# Altium PCB AC_FILTER_220V.PcbDoc
Units mm, origin at the board's own origin, x right, y up, seen from the top; angles counter-clockwise.
Board outline 50 x 35 mm, 2 copper layers (Top Layer, Bottom Layer); 9 components, 8 nets, 21 pads, 0 vias.
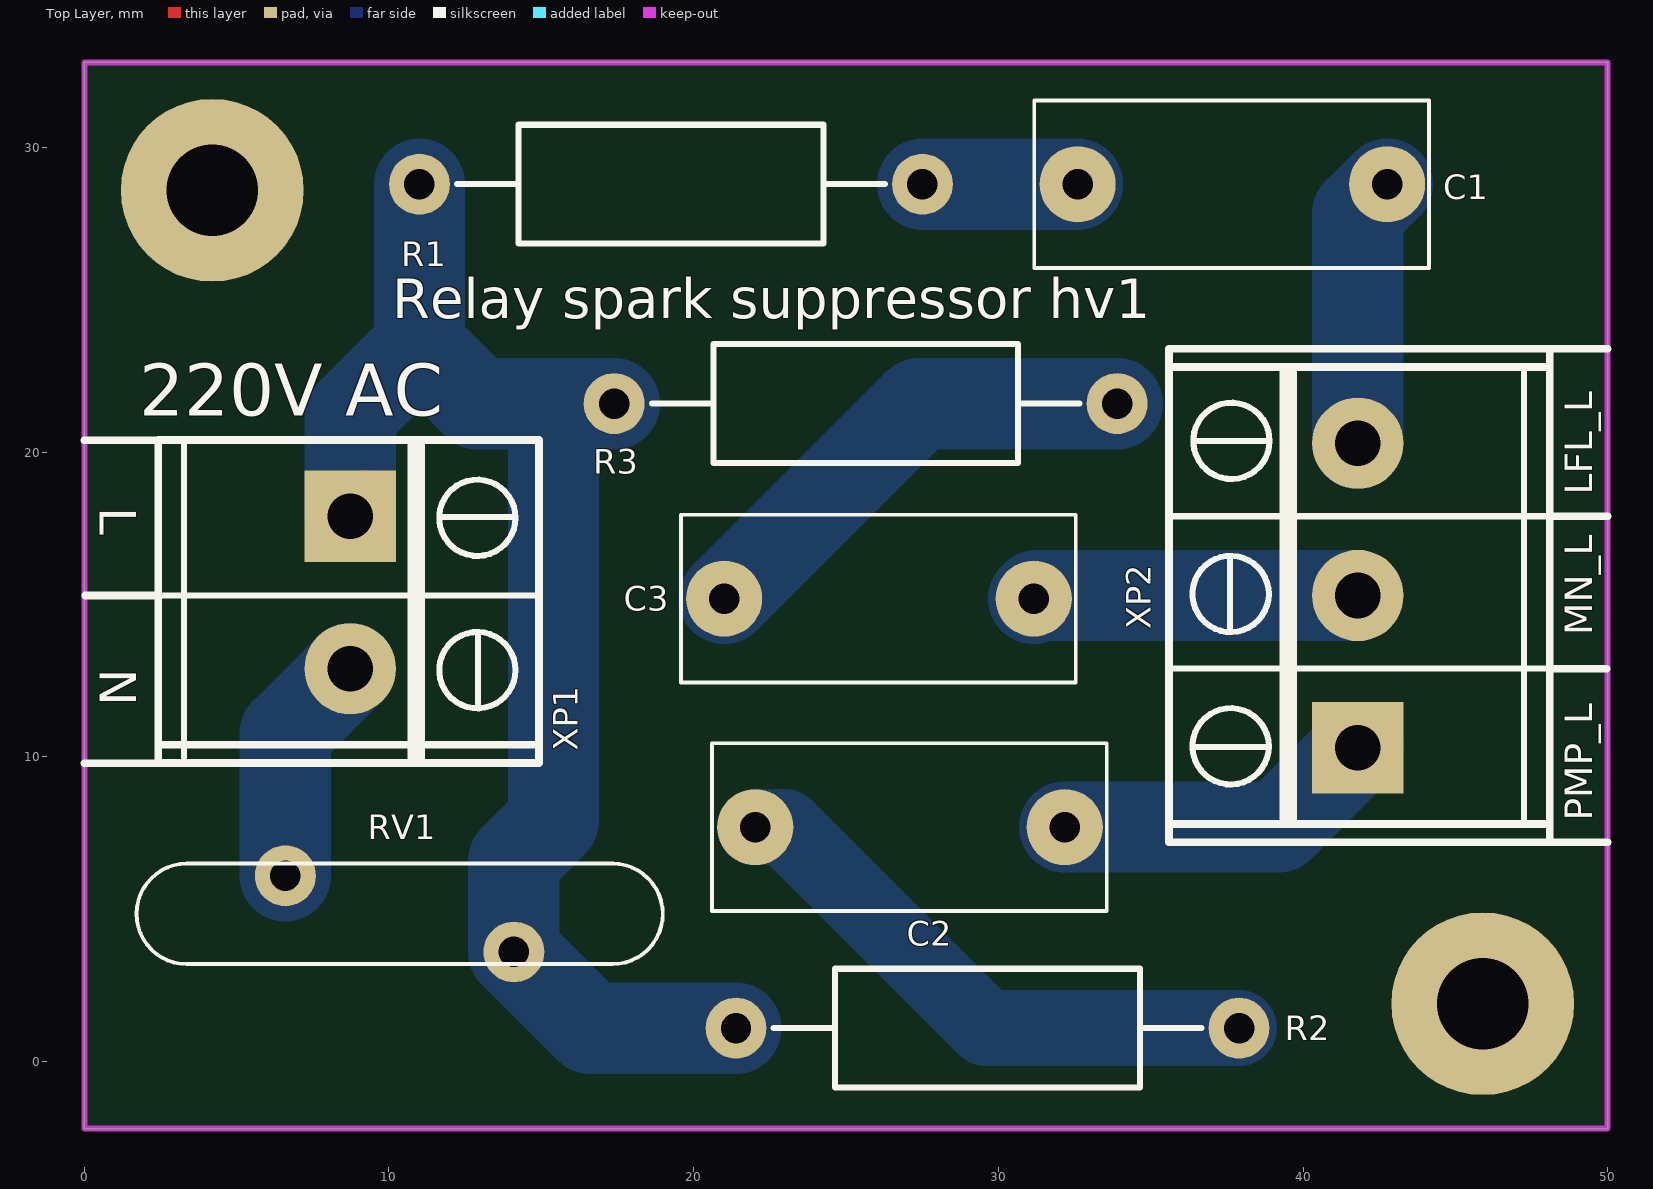
[diagram p0: Top Layer view]
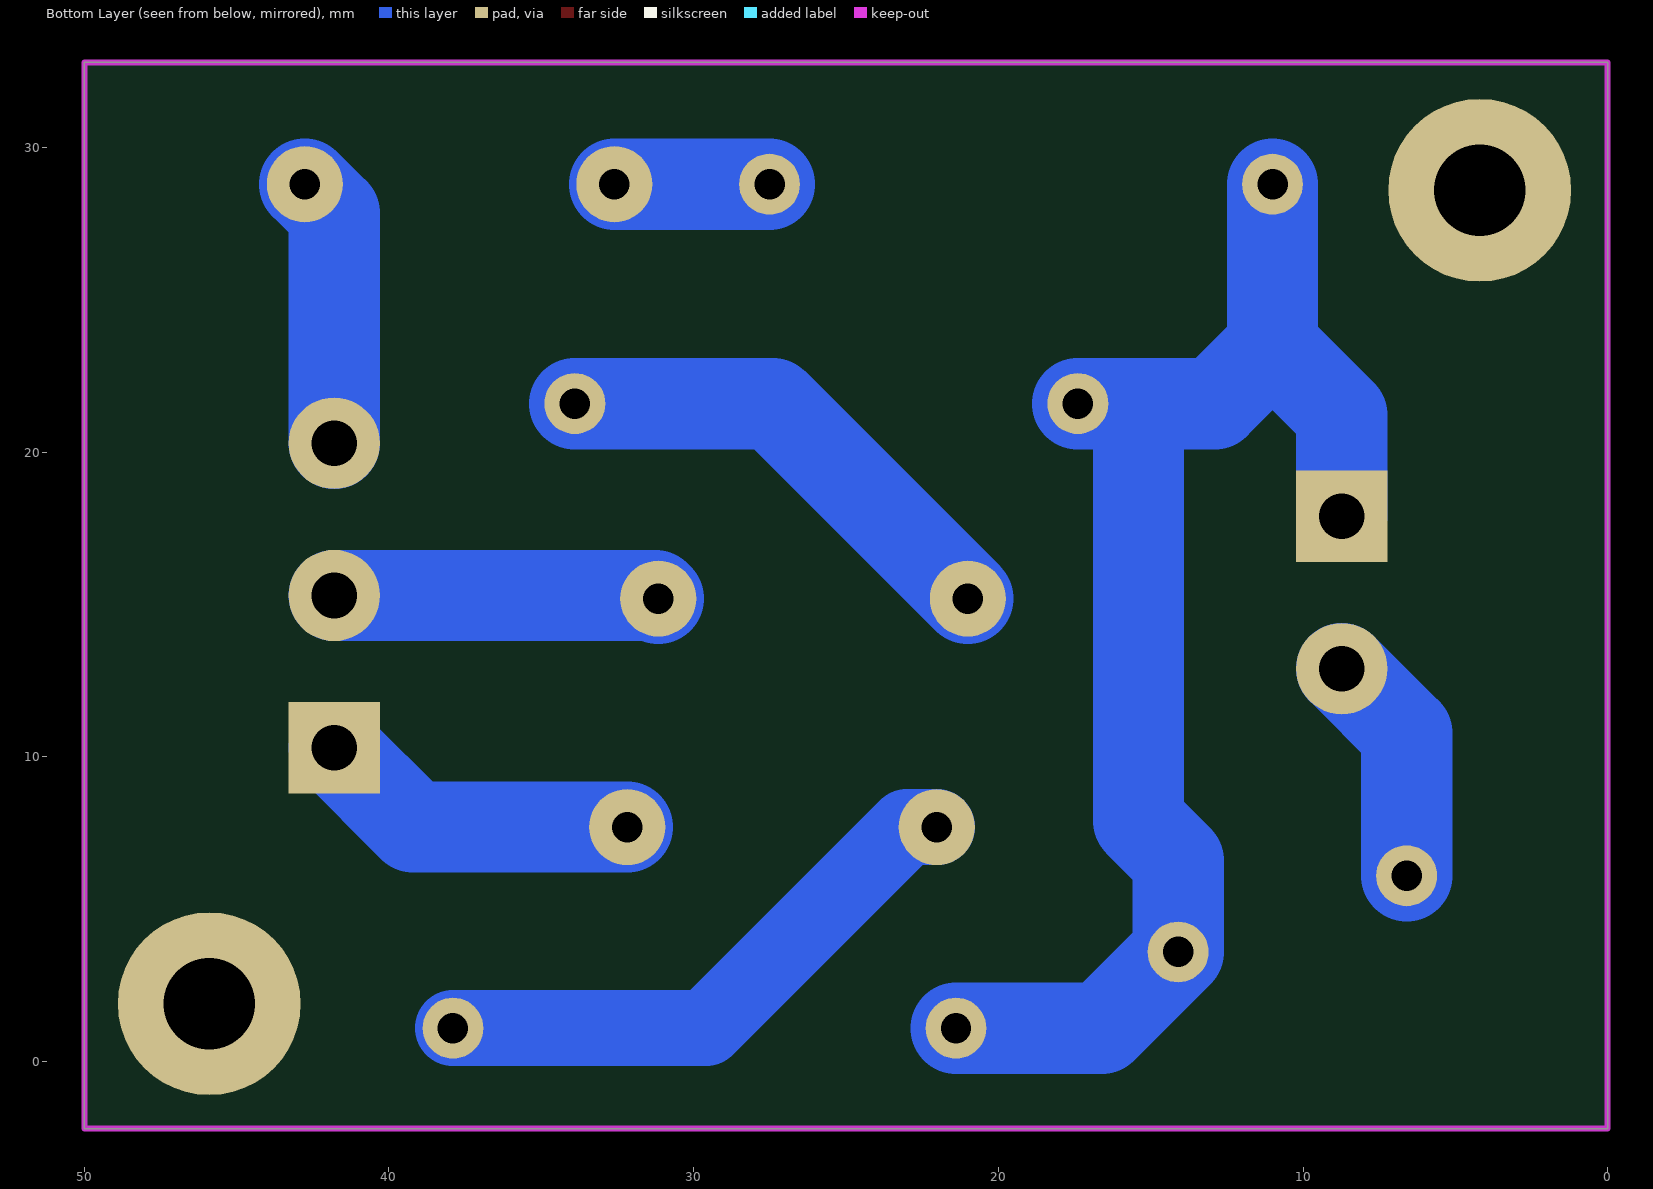
[diagram p1: Bottom Layer view, seen from below]
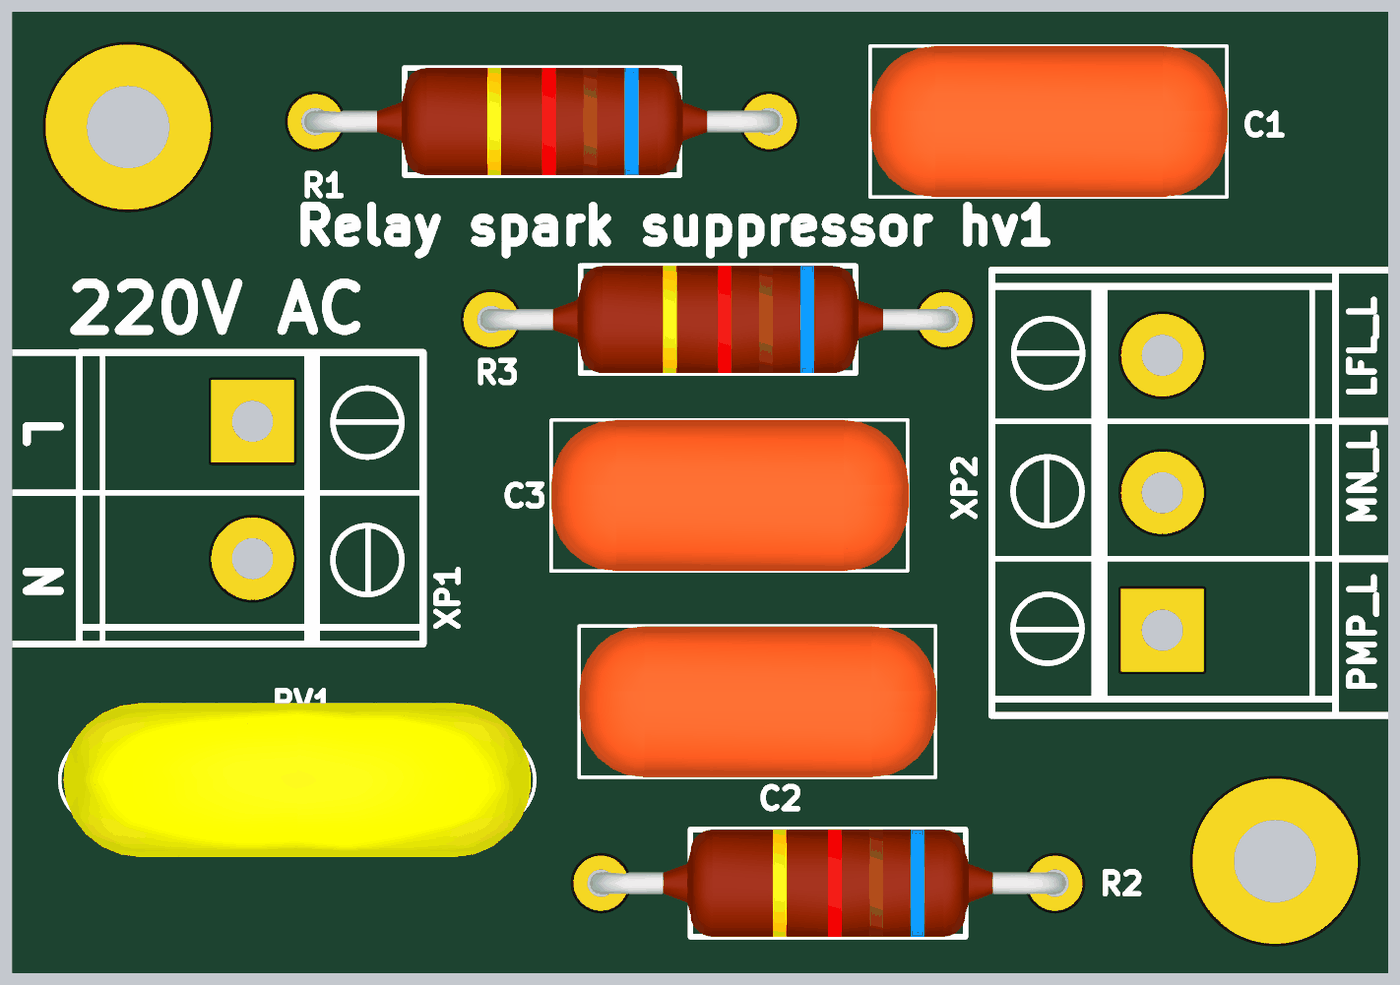
[diagram p2: 3D render of the assembled board from above, using the file's embedded part models]

## Layer stack, top to bottom
Top Solder: solder mask 0.0102, Solder Resist, Dk 3.5
Top Layer: signal copper 0.0356
Dielectric 1: dielectric 0.32, FR-4, Dk 4.8
Bottom Layer: signal copper 0.0356
Bottom Solder: solder mask 0.0102, Solder Resist, Dk 3.5

## Board outline
0,-2.2 0,32.8 50,32.8 50,-2.2

## Design rules (kind name [scope] priority, off if disabled: settings)
Clearance [All] p1: gap=1 ignorepadtopadclearanceinfootprint=FALSE
PolygonConnect [All] p1: connectstyle=Relief reliefconductorwidth=0.254 reliefentries=4 polygonreliefangle="90 Angle" airgapwidth=0.254
RoutingVias [All] p1: holewidth=0.711 width=1.27 viastyle="Through Hole" minholewidth=0.711 minwidth=1.27 maxholewidth=0.711 maxwidth=1.27
SolderMaskExpansion [All] p1: expansion=0.102
Width [All] p1: maxlimit=5 minlimit=0.2 preferedwidth=1
30 further rules are at their usual default settings.

## Components (designator, comment, footprint, x,y, rotation, side; value= is the part's Value field where it differs from the comment)
C1 "TS08S02S104KBB0D0R" CAP_HV_13x5 37.68,28.8 r0 top
C2 "TS08S02S104KBB0D0R" CAP_HV_13x5 27.1,7.7 r0 top
C3 "TS08S02S104KBB0D0R" CAP_HV_13x5 26.08,15.2 r0 top
R1 "СFR 1/2W-S (3 x 9)  27E" RES_10x4_THD 19.31,28.8 r180 top
R2 "СFR 1/2W-S (3 x 9)  27E" RES_10x4_THD 29.7,1.1 r180 top
R3 "СFR 1/2W-S (3 x 9)  27E" RES_10x4_THD 25.7,21.6 r180 top
RV1 "KLS6-14D431K" Varistor_14MM 10.35,4.85 r0 top
XP1 "DG330-2P" DG330-2P 8.7,15.3 r270 top
XP2 "DG330-3PIN" DG330-3P 41.8,15.3 r90 top

## Footprints (in the part's own frame and the unit in brackets; to place one, negate y for a bottom-side part, rotate by r counter-clockwise, add the part's x,y. Pads: shape width x height; smd on the part's side, far side on the other; paste and mask are expansions set on the pad)
CAP_HV_13x5 [mm]
  round 2.5 hole 1: 1(-5.08,0) 2(5.08,0)
  silkscreen extent -6.5,-2.75 6.46,2.75, body extent -6.5,-2.75 6.5,2.75, height 11
DG330-2P [mm]
  rect 3x3 hole 1.5: 1(-2.6,0.025)
  round 3 hole 1.5: 2(2.4,0.025)
  silkscreen extent -5.1,-6.27 5.6,6.23, body extent -4.97,-6.15 5.38,6.1, height 13
DG330-3P [mm]
  rect 3x3 hole 1.5: 1(-5,0)
  round 3 hole 1.5: 2(0,0) 3(5,0)
  silkscreen extent -8.1,-6.3 8.1,6.2, body extent -7.98,-6.17 7.98,6.07, height 13
RES_10x4_THD [mm]
  round 2 hole 1: 1(-8.2,0) 2(8.31,0)
  silkscreen extent -6.96,-1.95 7.07,1.95, body extent -8.59,-1.95 8.7,1.95, height 3.9
Varistor_14MM [mm]
  round 2 hole 1: 1(-3.75,1.25) 2(3.75,-1.25)
  silkscreen extent -8.64,-1.65 8.64,1.65, body extent -8.5,-2.8 8.49,2.8, height 20.5

## Part data
C1 C2 C3: library part CAP_HV_13x5
R1 R2 R3: library part RC_1003_THR, "THR resisto r10x3mm 0.5W"
RV1: "Varistor diameter 14mm"
XP1: "Degson 2 pin connector rear"
XP2: library part DG330-3P, "Degson 3 pin connector rear"

## Free pads (board coordinates)
  round 6 hole 3: 0(4.2,28.6) 0(45.9,1.9)

## Nets (pads, with @x,y where several pads share a name; then routed paths per layer and width w, separated by ;. In a path a pad name is that pad's centre, name@x,y a point inside that pad or via, vN(x,y) a via of type N, cw(c..) or ccw(c..) an arc to the next point about the centre after c; other vN are vias at no path point)
NetC1_1: C1.1 R1.1 | length 5.1
  Bottom Layer w3: R1.1 C1.1
NetC1_2: C1.2 XP2.3 | length 8.9
  Top Layer w2: C1.2 C1.2@42.76,28.824
  Bottom Layer w3: XP2.3 41.8,27.84 C1.2
NetC2_1: C2.1 R2.1 | length 18.6
  Bottom Layer w2.5: C2.1 23,7.7 29.6,1.1 R2.1
NetC2_2: C2.2 XP2.1 | length 10.7
  Bottom Layer w3: C2.2 39.2,7.7 XP2.1
NetC3_1: C3.1 R3.1 | length 15.6
  Bottom Layer w3: C3.1 27.4,21.6 R3.1
NetC3_2: C3.2 XP2.2 | length 10.7
  Bottom Layer w3: C3.2 31.26,15.3 XP2.2
NetR1_2: R1.2 R2.2 R3.2 RV1.2 XP1.1 | length 46.6
  Top Layer w2: XP1.1 XP1.1@9.225,18.4
  Bottom Layer w3: XP1.1 8.725,21.225 11,23.5 ; R1.2 11,23.5 ; R3.2 15.5,21.6 ; R2.2 16.6,1.1 RV1.2 14.1,6.6 15.4,7.9 15.4,21.5 15.5,21.6 ; 11,23.5 12.9,21.6 15.5,21.6
NetRV1_1: RV1.1 XP1.2 | length 7.8
  Top Layer w2.5: XP1.2@8.675,12.85 XP1.2
  Bottom Layer w3: RV1.1 6.6,10.775 XP1.2

## Keep-outs
Keep-Out Layer:
  the board outline again, w0.2

## Silkscreen, mask and mechanical layers (free items; w line width, h text height)
Top Overlay:
  lines w0.25: 0,9.8 2.425,9.8 ; 0,20.4 2.425,20.4 ; 0.025,15.3 2.45,15.3 ; 48.075,12.9 49.975,12.9 ; 48.1,7.2 50,7.2 ; 48.1,17.9 50,17.9 ; 48.1,23.4 50,23.4
  text "Relay spark suppressor hv1" at 10.1,24.4 h1.3
  text "220V AC" at 1.8,21.2 h1.7
  text "LFL_L" at 49.5,18.6 h0.9 r90
  text "L" at 0.5,18.2 h1.2 r270
  text "MN_L" at 49.5,14 h0.9 r90
  text "N" at 0.5,12.9 h1.2 r270
  text "PMP_L" at 49.5,7.9 h0.9 r90